# Altium PCB GoodProject_V2.1.PcbDoc
Units mil, origin at the board's own origin, x right, y up, seen from the top; angles counter-clockwise.
Board outline 2362.2 x 1574.8 mil, 2 copper layers (Top Layer, Bottom Layer); 65 components, 73 nets, 250 pads, 52 vias.
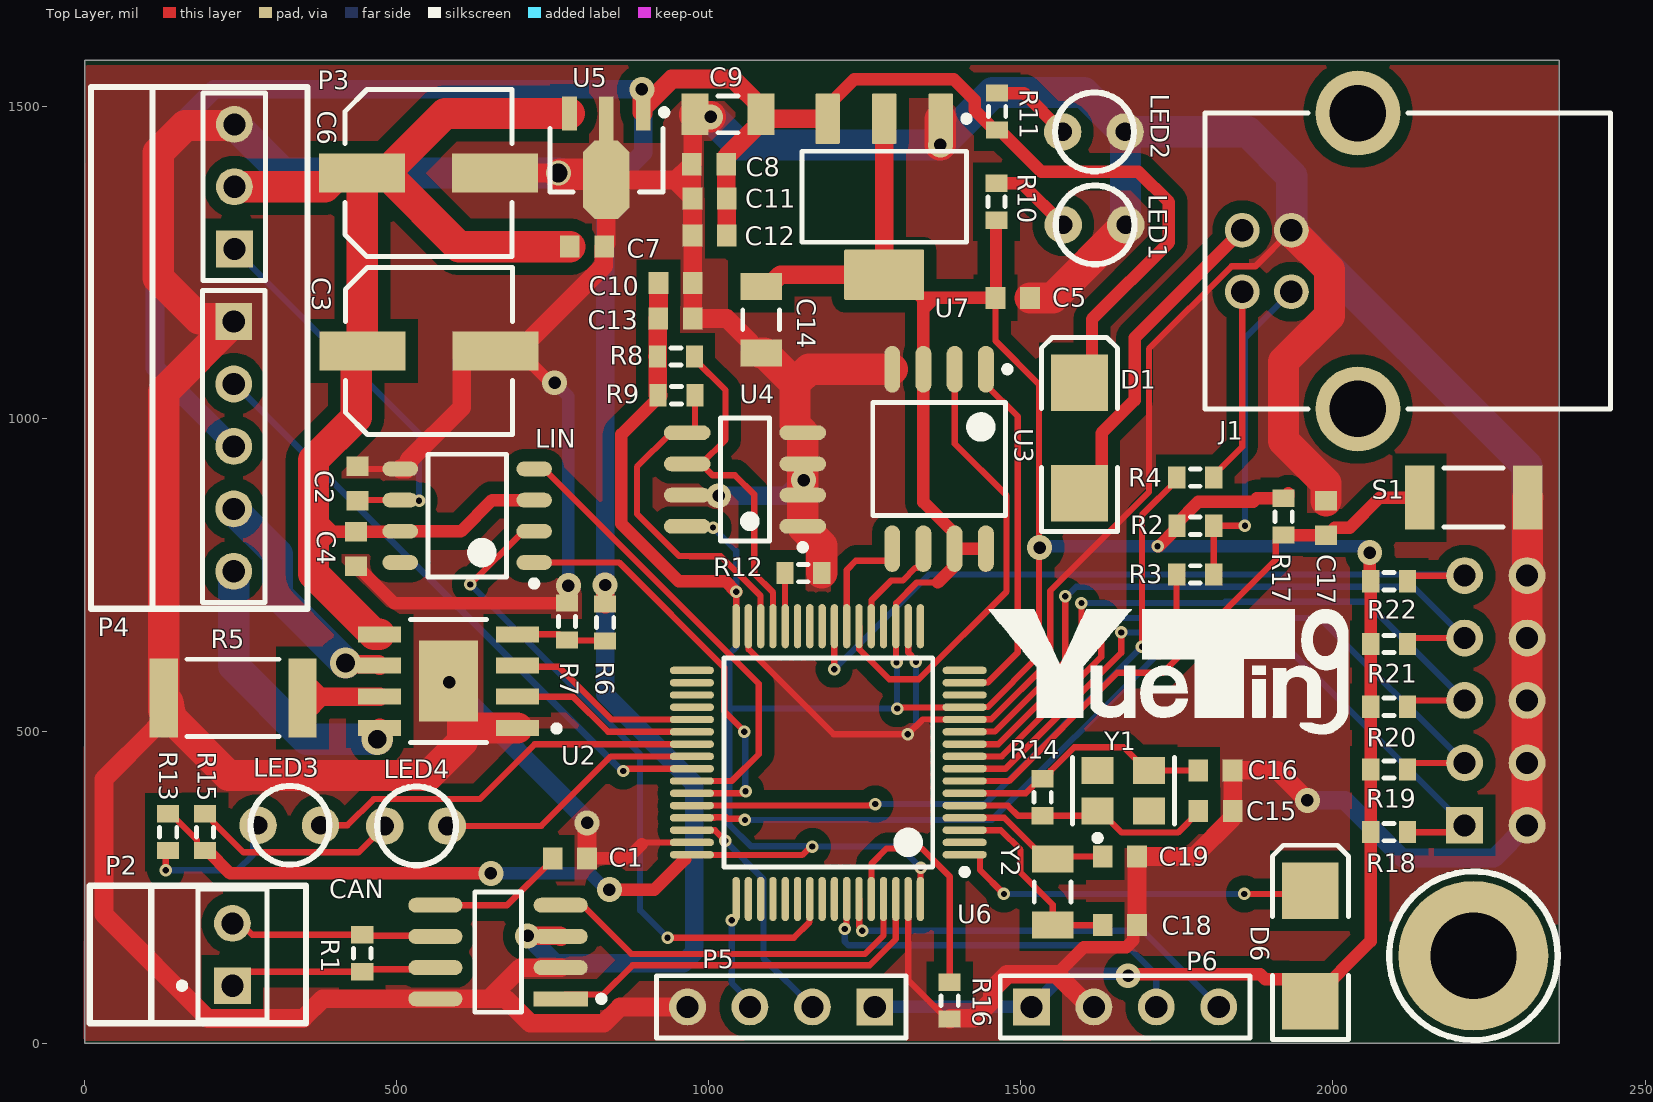
[diagram p0: Top Layer view]
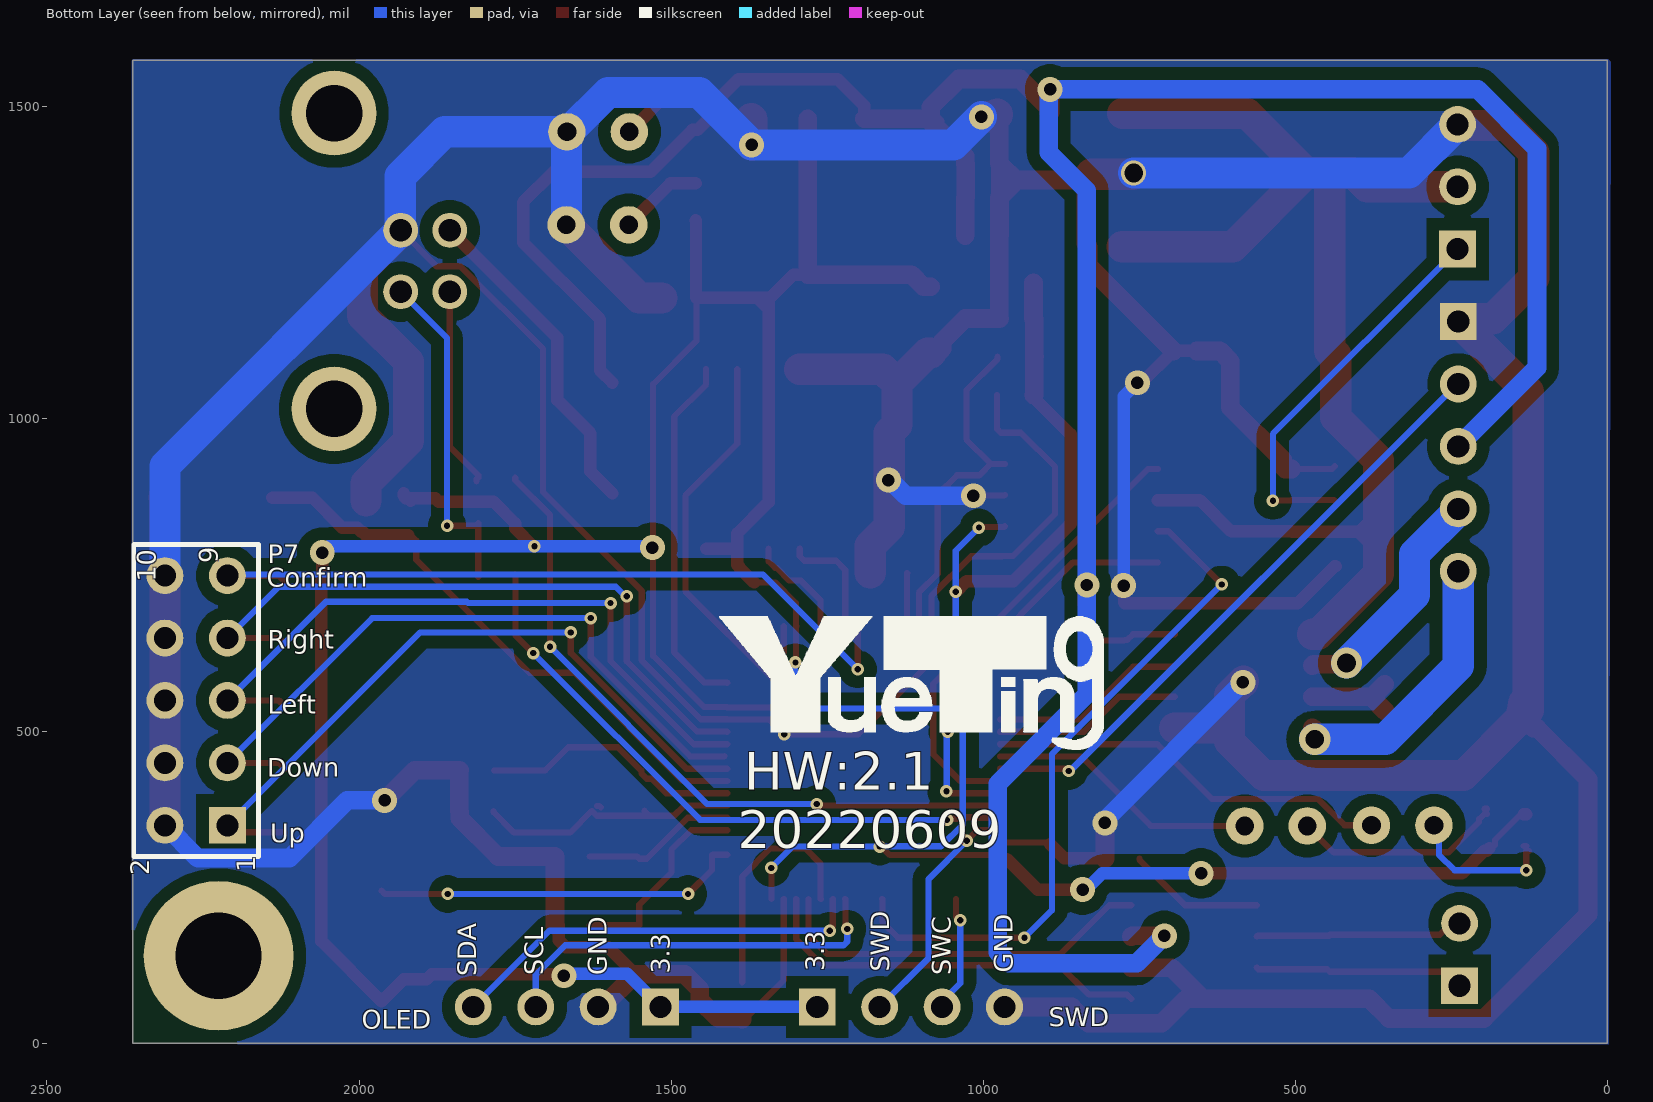
[diagram p1: Bottom Layer view, seen from below]

## Layer stack, top to bottom
Top Solder: solder mask 0.4, Solder Resist, Dk 3.5
Top Layer: signal copper 1.4
Dielectric 1: dielectric 12.6, FR-4, Dk 4.8
Bottom Layer: signal copper 1.4
Bottom Solder: solder mask 0.4, Solder Resist, Dk 3.5

## Board outline
0,0 0,1574.8 2362.2,1574.8 2362.2,0

## Design rules (kind name [scope] priority, off if disabled: settings)
Clearance [All] p1: gap=20 ignorepadtopadclearanceinfootprint=FALSE except(0: Arc-Text Track-Text SMDPad-Text THPad-Text Via-Text Fill-Text Poly-Text Region-Text Text-Text; 15: Arc-Arc Arc-Track Arc-SMDPad Arc-THPad Arc-Via Arc-Hole Track-Track Track-SMDPad Track-THPad Track-Via Track-Hole SMDPad-SMDPad SMDPad-THPad SMDPad-Via SMDPad-Hole THPad-THPad THPad-Via THPad-Hole Via-Via Via-Hole Text-Hole)
MinimumSolderMaskSliver [All] p1: minsoldermaskwidth=8
PlaneConnect [All] p1: planeconnectstyle=Direct reliefexpansion=20 reliefentries=4 reliefconductorwidth=10 reliefairgap=10
PolygonConnect [All] p1: connectstyle=Direct reliefconductorwidth=10 reliefentries=4 polygonreliefangle="90 Angle" airgapwidth=10
RoutingVias [All] p1: holewidth=10 width=20 viastyle="Through Hole" minholewidth=10 minwidth=20 maxholewidth=28 maxwidth=50
SilkToSilkClearance [All] p1: silktosilkclearance=2
SolderMaskExpansion [All] p1: expansion=4 istentingtop=FALSE
Width [All] p1: maxlimit=50 minlimit=10 preferedwidth=10
27 further rules are at their usual default settings.

## Components (designator, comment, footprint, x,y, rotation, side; value= is the part's Value field where it differs from the comment)
C1 "Cap" 1608[0603] 777.44,296 r0 top value=0.1uF
C2 "Cap" 1608[0603] 437,896.56 r270 top value=0.1uF
C3 "100uF" NIC-CAPA2-6.3X5.8_V 551.7,1109 r0 top
C4 "Cap" 1608[0603] 435,791.56 r90 top value=0.22uF
C5 "Cap" 1608[0603] 1487,1194 r0 top value=0.1uF
C6 "100uF" NIC-CAPA2-6.3X5.8_V 551,1394 r0 top
C7 "Cap" 1608[0603] 805,1276 r180 top value=22uF
C8 "Cap" 1608[0603] 1000.44,1408 r0 top value=22uF
C9 "Cap" C1206 1030.85,1488 r0 top value=100uF
C10 "Cap" 1608[0603] 947,1218 r180 top value=22pF
C11 "Cap" 1608[0603] 1001.44,1353 r0 top value=0.1uF
C12 "Cap" 1608[0603] 1001.44,1294 r0 top value=22uF
C13 "Cap" 1608[0603] 946.56,1161 r180 top value=22uF
C14 "Cap" C1206 1084,1158.85 r90 top value=22uF
C15 "Cap" 1608[0603] 1812,372 r0 top value=22pF
C16 "Cap" 1608[0603] 1811.56,437 r0 top value=22pF
C17 "Cap" 1608[0603] 1989,841.44 r270 top value=0.1uF
C18 "Cap" 1608[0603] 1658.56,189 r180 top value=22pF
C19 "Cap" 1608[0603] 1658.56,299 r180 top value=22pF
CAN "TJA1050T/CM,118" FP-SOT96-1-IPC_A 662.43,146 r180 top (schematic designator U1)
D1 "Diode" SMB 1594,969.42 r90 top
D6 "Diode 1N4148" SMB 1964,155.58 r90 top
J1 "61400416121" 61400416121 2120,1253 r90 top
LED1 "LED" led3mm 1568,1311 r0 top
LED2 "LED" led3mm 1567,1460 r0 top
LED3 "LED" led3mm 278,349 r0 top
LED4 "LED" led3mm 481,348 r0 top
LIN "TJA1020" SOP127P600X175-8N 613,845 r180 top (schematic designator *1)
P2 "Power" PIN2 236.88,92 r90 top
P3 "Header 3" HDR1X3 240,1272 r90 top
P4 "SENT" HDR1X5 239,1156 r270 top
P5 "SWD" HDR1X4 1266,58 r180 top
P6 "OLED" HDR1X4 1517,58 r0 top
P7 "Header 5X2" HDR2X5 2211,349 r90 bottom
R1 "Res3" J1-0603 445,144 r270 top value=120
R2 "Res3" J1-0603 1779.53,829 r180 top value=1.5K
R3 "Res3" J1-0603 1779.47,751 r180 top value=22
R4 "Res3" J1-0603 1779.47,906 r180 top value=22
R5 "0.12 1W" FP-CRCW2512-e3-IPC_C 238,553 r180 top
R6 "Res3" J1-0603 834,674 r270 top value=1K
R7 "Res3" J1-0603 773,675.47 r270 top value=1K
R8 "Res3" J1-0603 947.53,1100 r180 top value=4.7K
R9 "Res3" J1-0603 948.47,1038 r180 top value=4.7K
R10 "Res3" J1-0603 1461,1348 r90 top value=1K
R11 "Res3" J1-0603 1462,1492.53 r90 top value=1K
R12 "Res3" J1-0603 1151.47,753 r0 top value=10K
R13 "Res3" J1-0603 134,338 r270 top value=1K
R14 "Res3" J1-0603 1535,394 r270 top value=10M
R15 "Res3" J1-0603 193,338 r90 top value=1K
R16 "Res3" J1-0603 1386,68 r270 top value=10K
R17 "Res3" J1-0603 1921,843.44 r90 top value=10K
R18 "Res3" J1-0603 2090,338 r0 top value=10K
R19 "Res3" J1-0603 2090,438.5 r0 top value=10K
R20 "Res3" J1-0603 2090,539 r0 top value=10K
R21 "Res3" J1-0603 2090,639.5 r0 top value=10K
R22 "Res3" J1-0603 2090,740 r0 top value=10K
S1 "SW-PB" 12Z-2010 2225.39,874 r0 top
U2 "A4950ELJTR-T" FP-LJ-8-MFG 583,580 r180 top
U3 "W25Q128FVSIG" WINB-SOIC-8_M 1369,936 r270 top
U4 "24C02C-I/SN" SOIC-SN8_L 1058,903 r180 top
U5 "L78L05ABUTR" SOT-89_N 836,1414.5 r270 top
U6 "STM32F103RBT6" LQFP64_N 1191.5,449.53 r180 top
U7 "REG1117-3.3" DCY0004A_M 1281,1356 r270 top
Y1 "8M" FP-ASE-MFG 1664.34,404.52 r0 top
Y2 "32.768k" C1206 1551,242.15 r90 top

## Footprints (in the part's own frame and the unit in brackets; to place one, negate y for a bottom-side part, rotate by r counter-clockwise, add the part's x,y. Pads: shape width x height; smd on the part's side, far side on the other; paste and mask are expansions set on the pad)
12Z-2010 [mm] "Chip Resistor, Body 5.0x2.5mm, IPC High Density"
  rect 1.2x2.6 smd: 1(-2.2,0) 2(2.2,0)
  silkscreen extent -1.2,-1.2 1.2,1.2, body extent -2.58,-1.33 2.58,1.33, height 0.9
1608[0603] [mm] "Chip Capacitor, Body 1.6x0.8mm, IPC High Density"
  rect 0.8x0.9 smd: 1(-0.7,0) 2(0.7,0)
  body extent -0.87,-0.48 0.87,0.48, height 1.3
61400416121 [mm] "USB 2.0 Type B Horizontal"
  round 1.42 hole 0.92: 1(1.25,6.74) 2(-1.25,6.74) 3(-1.25,4.74) 4(1.25,4.74)
  round 3.45 hole 2.3: Shell(-6.02,2.03) Shell(6.02,2.03)
  silkscreen extent -6.02,-8.25 6.02,8.25, body extent -7.48,-8.25 7.48,8.25, height 11.08
C1206 [mm] "Chip Capacitor, Body 3.2x1.6mm, IPC High Density"
  rect 1.1x1.7 smd: 1(-1.35,0) 2(1.35,0)
  silkscreen extent -0.4,-0.75 0.4,0.75, body extent -1.7,-0.9 1.7,0.9, height 1.3
DCY0004A_M [mm] "SOT223, 4-Leads, Body 6.7x3.7mm, Pitch 2.3mm, IPC Low Density"
  rrect10% 2.05x1 smd: 1(-3.175,2.3) 2(-3.175,0) 3(-3.175,-2.3)
  rrect5% 2.05x3.25 smd: 4(3.175,0)
  silkscreen extent -3.3,-3.35 1.85,3.48, body extent -3.5,-3.25 3.5,3.25, height 1.62
FP-ASE-MFG [mm]
  rect 1.3x1.1 smd paste+0 mask+0: 1(-1.05,-0.825) 2(1.05,-0.825) 3(1.05,0.825) 4(-1.05,0.825)
  silkscreen extent -2.07,-2.05 2.07,1.35, body extent -1.8,-1.48 1.8,1.48, height 0.25
FP-CRCW2512-e3-IPC_C [mil]
  rect 45.47x126.31 smd paste+0 mask+0: 1(-111.25,0) 2(111.25,0)
  silkscreen extent -74,-62 74,62, body extent -138,-69 138,69, height 10
FP-LJ-8-MFG [mm]
  rect 1.75x0.65 smd paste+0 mask+0: 1(-2.8,1.905) 2(-2.8,0.635) 3(-2.8,-0.635) 4(-2.8,-1.905) 5(2.8,-1.905) 6(2.8,-0.635) 7(2.8,0.635) 8(2.8,1.905)
  rect 2.41x3.3 smd paste+0 mask+0: 9(0,0)
  silkscreen extent -4.52,-2.5 1.55,2.5, body extent -3.77,-2.6 3.77,2.6, height 0.25
FP-SOT96-1-IPC_A [mil]
  rect 86.79x23.94 smd paste+0 mask+0: 1(-100.43,75)
  rrect100% 86.79x23.94 smd paste+0 mask+0: 2(-100.43,25) 3(-100.43,-25) 4(-100.43,-75) 5(100.43,-75) 6(100.43,-25) 7(100.43,25) 8(100.43,75)
  silkscreen extent -170,-96 37,96, body extent -164,-116 164,116, height 10
HDR1X3 [mm] "Connector; Header; 3 Position"
  rect 1.5x1.5 hole 0.9: 1(0,0)
  round 1.5 hole 0.9: 2(2.54,0) 3(5.08,0)
  silkscreen extent -1.27,-1.27 6.35,1.27
HDR1X4 [mm] "Connector; Header; 4 Position"
  rect 1.5x1.5 hole 0.9: 1(0,0)
  round 1.5 hole 0.9: 2(2.54,0) 3(5.08,0) 4(7.62,0)
  silkscreen extent -1.27,-1.27 8.89,1.27
HDR1X5 [mm] "Connector; Header; 5 Position"
  rect 1.5x1.5 hole 0.9: 1(0,0)
  round 1.5 hole 0.9: 2(2.54,0) 3(5.08,0) 4(7.62,0) 5(10.16,0)
  silkscreen extent -1.27,-1.27 11.43,1.27
HDR2X5 [mm] "Connector; Header; 5x2 Position"
  rect 1.5x1.5 hole 0.9: 1(0,0)
  round 1.5 hole 0.9: 2(0,2.54) 3(2.54,0) 4(2.54,2.54) 5(5.08,0) 6(5.08,2.54) 7(7.62,0) 8(7.62,2.54) 9(10.16,0) 10(10.16,2.54)
  silkscreen extent -1.27,-1.27 11.43,3.81
J1-0603 [mm] "Chip Resistor, Body 1.6x0.8mm, IPC High Density"
  rect 0.7x0.9 smd: 1(-0.75,0) 2(0.75,0)
  silkscreen extent -0.2,-0.35 0.2,0.35, body extent -0.85,-0.48 0.85,0.48, height 0.9
led3mm [mil]
  round 60 hole 30: 1(0,0) 2(100,0)
  silkscreen extent -12,-63 114,63
LQFP64_N [mm] "Thin QFP, 64-Leads, Body 10x10mm, Pitch 0.5mm, IPC Medium Density"
  oval 1.8x0.3 smd: 1(-5.55,3.75) 2(-5.55,3.25) 3(-5.55,2.75) 4(-5.55,2.25) 5(-5.55,1.75) 6(-5.55,1.25) 7(-5.55,0.75) 8(-5.55,0.25) 9(-5.55,-0.25) 10(-5.55,-0.75) 11(-5.55,-1.25) 12(-5.55,-1.75) 13(-5.55,-2.25) 14(-5.55,-2.75) 15(-5.55,-3.25) 16(-5.55,-3.75) 33(5.55,-3.75) 34(5.55,-3.25) 35(5.55,-2.75) 36(5.55,-2.25) 37(5.55,-1.75) 38(5.55,-1.25) 39(5.55,-0.75) 40(5.55,-0.25) 41(5.55,0.25) 42(5.55,0.75) 43(5.55,1.25) 44(5.55,1.75) 45(5.55,2.25) 46(5.55,2.75) 47(5.55,3.25) 48(5.55,3.75)
  oval 0.3x1.8 smd: 17(-3.75,-5.55) 18(-3.25,-5.55) 19(-2.75,-5.55) 20(-2.25,-5.55) 21(-1.75,-5.55) 22(-1.25,-5.55) 23(-0.75,-5.55) 24(-0.25,-5.55) 25(0.25,-5.55) 26(0.75,-5.55) 27(1.25,-5.55) 28(1.75,-5.55) 29(2.25,-5.55) 30(2.75,-5.55) 31(3.25,-5.55) 32(3.75,-5.55) 49(3.75,5.55) 50(3.25,5.55) 51(2.75,5.55) 52(2.25,5.55) 53(1.75,5.55) 54(1.25,5.55) 55(0.75,5.55) 56(0.25,5.55) 57(-0.25,5.55) 58(-0.75,5.55) 59(-1.25,5.55) 60(-1.75,5.55) 61(-2.25,5.55) 62(-2.75,5.55) 63(-3.25,5.55) 64(-3.75,5.55)
  silkscreen extent -5.68,-4.25 4.25,4.57, body extent -5,-5 5,5, height 1.6
NIC-CAPA2-6.3X5.8_V [mm] "Aluminum Electrolytic Capacitor, Diameter 6.3mm, Height 6.1mm, Pitch 5.4mm"
  rect 3.5x1.6 smd: 1(-2.7,0) 2(2.7,0)
  silkscreen extent -3.4,-3.4 3.4,3.4, body extent -3.14,-3.12 3.14,3.15, height 6.1
PIN2 [mm] "Photosensitive Diode; 2 Leads"
  rect 1.5x1.5 hole 0.9: 1(0,0)
  round 1.5 hole 0.9: 2(2.54,0)
  silkscreen extent -1.4,-1.4 3.94,2.17
SMB [mm] "DO-214-AA/SMB; 2 C-Bend Leads; Body 5.3 x 3.6 mm, inc. leads (LxW)"
  rect 2.3x2.3 smd: 1(-2.25,0) 2(2.25,0)
  silkscreen extent -3.8,-1.55 4.1,1.55
SOIC-SN8_L [mm] "SOIC, 8-Leads, Body 4.9x3.9mm, Pitch 1.27mm, IPC High Density"
  oval 1.9x0.6 smd: 1(-2.35,1.905) 2(-2.35,0.635) 3(-2.35,-0.635) 4(-2.35,-1.905) 5(2.35,-1.905) 6(2.35,-0.635) 7(2.35,0.635) 8(2.35,1.905)
  silkscreen extent -2.48,-2.5 1,2.88, body extent -2,-2.5 2,2.5, height 1.75
SOP127P600X175-8N [mm] "SOP, 8-Leads, Body 4.90x3.90mm, Pitch 1.27mm, IPC Medium Density"
  oval 1.45x0.6 smd: 1(-2.725,1.905) 2(-2.725,0.635) 3(-2.725,-0.635) 4(-2.725,-1.905) 5(2.725,-1.905) 6(2.725,-0.635) 7(2.725,0.635) 8(2.725,1.905)
  silkscreen extent -2.85,-2.5 1.6,2.88, body extent -2,-2.5 2,2.5, height 1.75
SOT-89_N [mm] "SOT89, 3-Leads, Body 4.5x2.4 mm, Pitch 1.5mm, Lead Span 4.1mm, IPC Medium Density"
  rect 1.4x0.6 smd: 1(-1.9,1.5) 3(-1.9,-1.5)
  rect 1.8x0.6 smd: 2(-1.7,0)
  oct 3.2x1.9 smd: 2(0.8,0)
  silkscreen extent -2.07,-2.3 1.3,2.48, body extent -1.3,-2.3 1.3,2.3, height 1.6
WINB-SOIC-8_M [mm] "SOIC, 8-Leads, Body 5.4x5.4mm, Pitch 1.27mm, IPC Low Density"
  oval 1.9x0.65 smd: 1(-3.65,1.905) 2(-3.65,0.635) 3(-3.65,-0.635) 4(-3.65,-1.905) 5(3.65,-1.905) 6(3.65,-0.635) 7(3.65,0.635) 8(3.65,1.905)
  silkscreen extent -3.77,-2.7 2.3,2.91, body extent -2.7,-2.7 2.7,2.7, height 2.16

## Part data
C1 C2 C4 C5 C7 C8 C9 C10 C11 C12 C13 C14 C15 C16 C17 C18 C19: "Capacitor", LatestRevisionDate=17-Jul-2002, LatestRevisionNote="Re-released for DXP Platform.", PackageDescription="Radial Cap, Thru-Hole; 2 Leads; 0.3 in Pin Spacing", PackageReference=RAD-0.3, Published=8-Jun-2000, Publisher="Altium Limited"
C3 C6: library part CMP-0687-00035-1, "Aluminum Electrolytic Capacitor, UD Series, Low Impedance, 68 uF, 16 V, + / - 20%, -55 to 105 degC, Chip Type, 6.3 x 5.8 mm D x L, Pb-Free, Reel", Manufacturer=Nichicon, PartNumber=UUD1C680MCL1GS, Rated Capacitance="68 uF", Rated Ripple Current (at 100kHz)="230 mA", Rated Voltage="50 V", Tolerance Rated Capacitance="-20 to 20%", ComponentLink1Description="Manufacturer URL", ComponentLink1URL=http://www.nichicon.co.jp/, ComponentLink2Description=Datasheet, ComponentLink2URL=http://products.nichicon.co.jp/en/pdf/XJA043/e-ud.pdf, ComponentLink3Description="Package Specification", ComponentLink3URL=http://products.nichicon.co.jp/en/pdf/XJA043/e-ud.pdf, DatasheetVersion=08/2012, Diameter="6.3 mm", Endurance Time="2000 h", Impedance="0.44 Ohm", Length="5.8 mm", Mounting Technology="Surface Mount", PackageDescription="2-Pin Surface Mount Device, Diameter 6.3 mm, Height 5.8 mm, Pitch 5.4 mm", PackageReference=CAPAE-D6.3H5.8, Packing="Dia382mm Reel", RoHS=TRUE
CAN: library part CMP-2000-04923-2, "IC TRANSCEIVER HALF 1/1 8SO", Case/Package=SO, Max Operating Temperature=150°C, Max Supply Current=10mA, Max Supply Voltage=5.25V, Min Operating Temperature=-40°C, Min Supply Voltage=4.75V, Package Quantity=2500, Contact Plating=Gold, Data Rate=1Mbps, Interface=CAN, Lead Free="Lead Free", Mount="Surface Mount", Nominal Supply Current=10mA, Number of Pins=8, Number of Receive Buffers=1, Number of Transceivers=1, Number of Transmit Buffers=1, Packaging="Tape and Reel", Radiation Hardening=No, REACH SVHC="No SVHC", Receiver Hysteresis=70mV, Simplex/Duplex="Half Duplex"
D1: "Default Diode", Code_JEDEC=DO-214-AB, LatestRevisionDate=17-Jul-2002, LatestRevisionNote="Re-released for DXP Platform.", PackageDescription="DO-214-AB/SMC; 2 C-Bend Leads; Body 7.9 x 5.9 mm, inc. leads (LxW)", PackageReference=SMC, PackageVersion=Sep-1996, Published=8-Jun-2000, Publisher="Altium Limited"
D6: "High Conductance Fast Diode", Code_JEDEC=DO-204-AH, ComponentLink1Description="Manufacturer Link", ComponentLink1URL=http://www.fairchildsemi.com/, ComponentLink2Description=Datasheet, ComponentLink2URL=http://www.fairchildsemi.com/ds/1N%2F1N4148.pdf, DatasheetVersion=1997, LatestRevisionDate=17-Jul-2002, LatestRevisionNote="Re-released for DXP Platform.", PackageDescription="Diode, Axial; Body 3.8 x 1.9 mm (LxDia. max), Lead Dia. 0.53 mm (max)", PackageReference=DO-35, Published=8-Jun-2000, Publisher="Altium Limited"
J1: library part CMP-1502-03243-1, "USB 2.0 Type B Receptacle WR-COM, Horizontal, THT, with Pads and Pegs", Contact Resistance=20mOhm, Manufacturer="Wurth Elektronik", Operating Temperature=-40to105degC, Rated Current=1.5A, Working Voltage=30VAC, Connector Type=USB2.0TypeB, Datasheet URL=https://katalog.we-online.de/em/datasheet/61400416121.pdf, Gender=Receptacle, Manufacturer URL=http://www.we-online.de, Mounting Technology=THT, Orientation=Horizontal, Package Reference=61400416121, Packaging=Tray, Part Number=61400416121, Publisher=WurthElektronik
P2: library part "Header 2H", "Header, 2-Pin, Right Angle", LatestRevisionDate=17-Jul-2002, LatestRevisionNote="Re-released for DXP Platform.", Publisher="Altium Limited"
P3: "Header, 3-Pin", LatestRevisionDate=17-Jul-2002, LatestRevisionNote="Re-released for DXP Platform.", Publisher="Altium Limited"
P4: library part "Header 5", "Header, 5-Pin", LatestRevisionDate=17-Jul-2002, LatestRevisionNote="Re-released for DXP Platform.", Publisher="Altium Limited"
P5 P6: library part "Header 4", "Header, 4-Pin", LatestRevisionDate=17-Jul-2002, LatestRevisionNote="Re-released for DXP Platform.", Publisher="Altium Limited"
P7: "Header, 5-Pin, Dual row", LatestRevisionDate=17-Jul-2002, LatestRevisionNote="Re-released for DXP Platform.", Publisher="Altium Limited"
R1 R2 R3 R4 R6 R7 R8 R9 R10 R11 R12 R13 R14 R15 R16 R17 R18 R19 R20 R21 R22: "Resistor", LatestRevisionDate=29-May-2009, LatestRevisionNote="IPC-7351 Footprint Added.", PackageDescription="Chip Resistor", PackageReference=J1-0603, Published=8-Jun-2000, Publisher="Altium Limited"
R5: library part CMP-02407-006956-1, "RES Thick Film, 1Ω, 1%, 1W, 100ppm/°C, 2512", Case Code (Imperial)=2512, Case Code (Metric)=6432, Max Operating Temperature=155°C, Max Power Dissipation=1W, Min Operating Temperature=-55°C, Package Quantity=2000, Resistance=1R, Temperature Coefficient=100ppm/°C, Tolerance=1%, Voltage Rating=500V, Case/Package=2512, Composition="Thick Film", Contact Plating=Tin, Depth=3.15mm, Features="Automotive AEC-Q200", Height=0.6mm, Lead Free="Lead Free", Length=6.3mm, Military Standard=Not, Mount="Surface Mount", Number of Pins=2, Number of Terminations=2, Packaging="Tape and Reel", Power Rating=1W, Radiation Hardening=No, REACH SVHC="No SVHC", Termination=SMD/SMT, Voltage Rating (DC)=500V, Weight=0.001429oz, Width=0.124inch
S1: "Switch", LatestRevisionDate=17-Jul-2002, LatestRevisionNote="Re-released for DXP Platform.", PackageDescription="Switch; 2 Leads", PackageReference=SPST-2, Published=24-Mar-1999, Publisher="Altium Limited"
U2: library part CMP-82903-000003-1, "IC MOTOR DRIVER 8V-40V 8SOIC", Case/Package=SOIC, Collector Emitter Voltage (VCEO)=40V, Max Collector Current=3.5A, Max Operating Temperature=85°C, Min Operating Temperature=-40°C, Min Supply Voltage=8V, Package Quantity=1, Height=1.55mm, Lead Free="Lead Free", Length=4.9mm, Max Supply Voltage=40V, Motor Type=Brushed, Mount="Surface Mount", Number of Outputs=1, Number of Pins=8, Output Current=3.5A, Output Voltage=40V, Packaging="Tape and Reel", Radiation Hardening=No, REACH SVHC="No SVHC", Width=3.9mm
U3: library part CMP-2000-05005-1, "3V 128M-Bit Serial Flash Memory with Dual/Quad SPI & QPI, 2.7 to 3.6 V, -40 to 85 degC, 8-Pin SOIC, RoHS, Tape and Reel", Manufacturer=Winbond, Operating Supply Voltage (Max)=3.6V, Operating Supply Voltage (Min)=2.7V, Operating Supply Voltage (Typ)=3/3.3V, Operating Temp Range=-40Cto85C, Operating Temperature (Max)=85C, Operating Temperature (Min)=-40C, Operating Temperature Classification=Industrial, Package Description="8-Pin Small Outline Integrated Circuit, Body 5.28 x 5.28 mm, Pitch 1.27 mm", Package Reference=SS-8, Package Type=SOICW, Program/Erase Volt (Typ)=2.7to3.6V, Supply Current=20mA, Access Time (Max)=7ns, Address Bus=24b, Boot Type=NotRequired, Cell Type=NOR, Datasheet URL=http://download.siliconexpert.com/pdfs/2015/11/30/6/42/17/890/win_/manual/3w25q128fv20rev.l2008242015.pdf, Datasheet Version="Rev. L, 08/2015", Density=134217728Bit, Interface Type=Serial(SPI), Manufacturer URL=http://www.winbond.com/hq/index.html?__locale=en, Mounting=SurfaceMount, Number of Words=16777216, Pin Count=8, Programmable=Yes, Rad Hardened=No, Sync/Async=Synchronous, Word Size=8b
U4: library part CMP-0159-00277-1, "2Kbit, 400kHz, 5V, I2C Serial EEPROM, 8-Pin SOIC 150mil, Industrial Temperature", Code_IPC=SOIC127P600-8, Code_JEDEC=MS-012, DatasheetVersion="revJ, Aug-2008", PackageDescription="8-Lead Plastic Small Outline (SN) - Narrow, 3.90mm Body [SOIC]", PackageReference=SOIC-SN8, PackageVersion="revBB, Aug-2009"
U5: library part CMP-0244-00406-1, "Positive Voltage Regulator, 5V, 4-Pin SOT-89, Tape and Reel", ComponentLink1Description="Manufacturer URL", ComponentLink1URL=http://www.st.com, ComponentLink2Description=Datasheet, ComponentLink2URL=http://www.st.com/internet/com/TECHNICAL_RESOURCES/TECHNICAL_LITERATURE/DATASHEET/CD00000446.pdf, DatasheetVersion=1/02/2011, PackageDescription="3-Pin SOT-89 Package 1.5 mm Pitch, 4.1 mm Lead Span", PackageReference=SOT-89, PackageVersion=2011
U6: "STM32 ARM-based 32-bit MCU with 128 Kbytes Flash, 64-pin LQFP, Industrial Temperature", ComponentLink1Description="Manufacturer Link", ComponentLink1URL=www.st.com/stm32, ComponentLink2Description=Datasheet, ComponentLink2URL=http://www.st.com/stonline/products/literature/ds/13587.pdf, DatasheetVersion="rev6, Mar-2008", PackageDescription="64-Pin Low-Profile Quad Flat Pack, 10 x 10 mm Body, 0.5 mm Pitch (LQFP64)", PackageReference=LQFP64, PackageVersion=Mar-2008, Published=30-May-2008, Publisher="Altium Limited"
U7: library part CMP-0395-00549-2, "Single Output LDO, 800 mA, Fixed 3.3 V Output, 3.8 to 15 V Input, with Internal Current Limiting, 4-pin SOT-223 (DCY), -40 to 125 degC, Green (RoHS & no Sb/Br)", Manufacturer="Texas Instruments", Rating=Catalog, Code_JEDEC=TO-261, ComponentLink1Description="Manufacturer URL", ComponentLink1URL=http://www.ti.com/, ComponentLink2Description=Datasheet, ComponentLink2URL=http://www.ti.com/general/docs/lit/getliterature.tsp?genericPartNumber=REG1117-33&fileType=pdf, ComponentLink3Description="Package Specification", ComponentLink3URL=http://www.ti.com/litv/pdf/mpds094a, DatasheetVersion=SBVS001D, Eco-Plan="Green (RoHS & no Sb/Br)", Fixed Output Options(V)=5, Iout(Max)(A)=0.8, Iq(Typ)(mA)=4, Mounting Technology="Surface Mount", PackageDescription="4-Pin Plastic Small Outline, Body 3.5 x 6.5 mm, Pitch 2.3 mm", PackageReference=DCY0004A, PackageVersion=4202506/B, PartNumber=REG1117-3.3, SubFamily="Single Channel LDO", Vdo(Typ)(mV)=1100, Vin(Max)(V)=15, Vin(Min)(V)=3.8, Vout Adj(Max)(V)=3.3, Vout Adj(Min)(V)=3.3
Y1: library part CMP-27762-010648-1, "XTAL Oscillator 33.333MHz ±50ppm CMOS 3.3V 4-SMD 3.2mm x 2.5mm", Case/Package=SMD/SMT, Frequency=33.333MHz, Frequency Stability=50ppm, Load Capacitance=15pF, Max Operating Temperature=85°C, Max Supply Current=13mA, Max Supply Voltage=3.465V, Min Operating Temperature=-40°C, Min Supply Voltage=3.135V, Operating Frequency="33.333 MHz", Operating Supply Voltage=3.3V, Package Quantity=1000, Depth=2.5mm, Height=0.047inch, Lead Free="Lead Free", Length=3.2mm, Mount="Surface Mount", Number of Pins=4, Packaging="Tape and Reel", Radiation Hardening=No, REACH SVHC="No SVHC", Series=ASE, Termination=SMD/SMT, Width=0.098inch
Y2: library part XTAL, "Crystal Oscillator", LatestRevisionDate=17-Jul-2002, LatestRevisionNote="Re-released for DXP Platform.", PackageDescription="Crystal, Thru-Hole; 2 Leads; Body 3.1 x 8.2 mm (Dia.xH)", PackageReference=R38, Published=8-Jun-2000, Publisher="Altium Limited"

## Free pads (board coordinates)
  round 240 hole 138: 5(2225,140)

## Via types
v1: diameter 20, hole 10, Top Layer to Bottom Layer, tented both sides, 28 vias
v2: diameter 40, hole 20, Top Layer to Bottom Layer, tented both sides, 9 vias
v3: diameter 40, hole 20, Top Layer to Bottom Layer, 8 vias
v4: diameter 20, hole 10, Top Layer to Bottom Layer, 4 vias
v5: diameter 50, hole 30, Top Layer to Bottom Layer, 2 vias
v6: diameter 40, hole 30, Top Layer to Bottom Layer, tented both sides, 1 vias

## Nets (pads, with @x,y where several pads share a name; then routed paths per layer and width w, separated by ;. In a path a pad name is that pad's centre, name@x,y a point inside that pad or via, vN(x,y) a via of type N, cw(c..) or ccw(c..) an arc to the next point about the centre after c; other vN are vias at no path point)
3.3: C5.1 C10.2 C13.2 C14.2 D6.1 P5.1 P6.1 R2.2 R8.2 R9.2 R10.1 R13.1 R15.1 R17.2 R18.1 R19.1 R20.1 R21.1 R22.1 U3.3 U3.7 U3.8 U4.8 U6.13 U6.19 U6.32 U6.48 U6.64 U7.2 U7.4 | length 7743.9
  Top Layer w10: R13.1 137.94,367.53 180.28,325.18 180.28,317.25 189.06,308.47 R15.1 ; U4.8 966.48,827 1006,827 v4(1007,826) ; U6.48 973.34,301.54 1016.47,301.54 1016.75,301.26 1149.56,301.26 1163.29,315 v1(1166,315) ; U6.32 1043.93,668.1 1043.93,722.93 v4(1044,723) ; v1(1300.91,609.94) 1300.11,610.74 1300.11,667.69 U6.19 1300.11,668.38 1300.11,704.96 1333.15,738 1367,738 ; v1(1302,536) 1303.76,537.76 1409.65,537.76 U6.13 1410.35,538.46 1446.93,538.46 1529,620.53 1529,1055.79 1459.44,1125.35 C5.1 ; U6.64 1339.44,231.32 1339.44,280.44 v1(1339.74,280.74)
  Top Layer w20: R13.1@130,367.06 R13.1@133.94,367.06 ; R15.1@189.22,312.25 R15.1 196.94,308.47 233.41,272 v2(651,272) ; v2(841,246) 913,246 962,295 ; R9.2@918.47,1038.47 915.17,1035.17 915.17,1030.28 860,975.12 860,832 951.84,740.16 1026.84,740.16 v4(1044,723) ; U7.4 1304.62,1231 U7.4@1341.62,1194 ; 1367,738 1391.2,762.2 1391.2,763.38 1394,766.18 U3.7 ; U3.8 U3.7 ; R10.1 1460.22,1317.69 1460.22,1194.78 C5.1 1362,1194 ; v2(1672,108) 1674.16,110.16 1883.84,110.16 1891.72,102.28 1928.72,102.28 D6.1 2060.47,163.47 R18.1 R19.1 R20.1 R21.1 R22.1 2059,741.47 v2(2059,785.88) ; v1(1719,796) 1720.94,796 1750,825.06 R2.2 1750,832.94 1784.06,867 1872,867 1877.97,872.97 R17.2 ; R17.2@1917.22,869.19 R17.2 ; R17.2@1928.72,880.69 1928.72,876.75 1924.94,872.97 R17.2 ; U7.4@1341.62,1194 1362,1194 ; U7.4@1341.62,1194 1344,1191.62 1344,1176 ; 1344,1176 U3.3 1344,866.91 1394,816.91 U3.7 ; 1344,1176 1362,1194
  Top Layer w30: R9.2 918.47,1038.47 918.47,1099.53 R8.2 918.5,1100.5 918.5,1160.5 C13.2 ; C13.2@919.44,1161.44 C10.2 ; C14.2 1095.81,1212 1114.81,1231 U7.4 U7.2
  Bottom Layer w10: v4(1007,826) 1044,789 v4(1044,723) 1044,634.65 1033,623.65 1033,538 ; v1(1300.91,609.94) 1301.5,609.35 1301.5,536.5 v1(1302,536) 1035,536 1033,538 ; v1(1339.74,280.74) 1305.1,315.38 1304.72,315 v1(1166,315) 1165.62,315.38 1067.69,315.38 1033,350.06 1033,538
  Bottom Layer w20: v2(651,272) 809.59,272 835.59,246 v2(841,246) ; P5.1 P6.1 1569.97,110.97 1669.03,110.97 v2(1672,108) ; v2(1530,794) 1532,796 v1(1719,796) 2048.88,796 v2(2059,785.88)
+5: C8.2 C9.2 C11.2 C12.2 CAN.3 D1.2 P4.3 R6.1 R11.1 U5.1 U7.3 | length 4850.5
  Top Layer w10: C11.2@1028,1354 C11.2
  Top Layer w20: C8.2 C8.2@1028,1409.97 ; C9.2@1072.35,1476.35 C9.2 C9.2@1091,1481 ; U7.3 1190.45,1501.67 1232.78,1544 1392.89,1544 1425.91,1510.98 1425.91,1495.15 1458.06,1463 R11.1 1465.94,1463 1532.94,1396 1688.28,1396 1737,1347.28 1737,1283 1614,1160 1614,1078 D1.2
  Top Layer w30: v2(710,172) 761.86,172 CAN.3 ; R6.1 v3(834,734) ; v3(893,1528) 893,1491.35 U5.1 895.06,1498.67 940.85,1544.46 1039.35,1544.46 1084,1499.81 C9.2 1084,1476.19 1028.75,1420.94 1028.75,1408.75 C8.2 1028,1355.97 1029,1354.97 C11.2 C12.2 ; C9.2@1091,1481 U7.3
  Bottom Layer w30: P4.3 113,1082 113,1433 208,1528 v3(893,1528) 894.91,1526.09 894.91,1426.91 834,1366 v3(834,734) 834,558.6 977,415.6 977,145.57 959.43,128 754,128 v2(710,172)
CAN-H: CAN.7 P2.1 R1.2 | length 337.1
  Top Layer w10: P2.1 259.35,114.47 R1.2 448.86,118.33 559.33,118.33 CAN.7
CAN-L: CAN.6 P2.2 R1.1 | length 333.8
  Top Layer w10: P2.2 250.16,192 268.63,173.53 R1.1 446.26,172.26 560.74,172.26 CAN.6
CAN-RX: CAN.4 U6.61 | length 620.2
  Top Layer w10: CAN.4 798,221 876,143 1250.53,143 1280.08,172.55 U6.61
CAN-TX: CAN.1 U6.62 | length 640.8
  Top Layer w10: CAN.1 769.83,77.97 830.97,77.97 878,125 1257.98,125 1299.76,166.78 U6.62
EE_SCL: R8.1 U4.6 U6.29 | length 560
  Top Layer w10: U4.6 U4.6@988,928 ; R8.1 977.06,1096.06 1027,1046.12 1027,967 U4.6@988,928 ; U6.29 1102.91,722.07 1073,751.98 1073,879 1042,910 1006,910 U4.6@988,928
EE_SDA: R9.1 U4.5 U6.30 | length 548.3
  Top Layer w10: R9.1 978,984.29 971.71,978 939.89,978 885,923.11 885,847.8 952.24,780.57 969.71,780.57 970.03,780.24 1019.28,780.24 1082.88,716.65 1082.88,668.38 U6.30
FLASH_CS: U3.1 U6.15 | length 580
  Top Layer w10: U6.15 1410.35,577.83 1446.93,577.83 1495,625.9 1495,1004.09 1444,1055.09 U3.1
FLASH_MISO: U3.2 U6.22 | length 741.7
  Top Layer w10: U6.22 1241.06,667.69 1241.06,631.11 1289.16,583 1336.53,583 1477,723.47 1477,877.45 1394,960.45 U3.2
FLASH_MOSI: U3.5 U6.23 | length 184.4
  Top Layer w10: U6.23 1221.02,758.02 1235.69,772.69 1286.8,772.69 1294,779.89 U3.5
FLASH_SCK: U3.6 U6.21 | length 171.3
  Top Layer w10: U6.21 1260.74,668.38 1260.74,709.74 1292,741 1310.7,741 1331.04,761.34 1333.43,761.34 1344,771.91 U3.6
GND: C1.2 C2.1 C3.2 C4.1 C5.2 C6.2 C7.1 C8.1 C9.1 C10.1 C11.1 C12.1 C13.1 C14.1 C15.2 C16.2 C17.1 C18.1 C19.1 CAN.2 CAN.8 J1.4 LED1.2 LED2.2 LIN.5 P3.3 P4.1 P5.4 P6.2 P7.2 P7.4 P7.6 P7.8 P7.10 R5.2 R7.1 R12.2 R16.2 S1.2 U2.1 U2.9 U3.4 U4.1 U4.2 U4.3 U4.4 U4.7 U5.2 U6.12 U6.18 U6.31 U6.47 U6.63 U7.1 | length 14294.5
  Top Layer w10: C2.1 441.12,920 LIN.5 ; 893,319 895.57,321.57 U6.47 ; U4.7 965.98,877.5 1015.5,877.5 v3(1016,877) ; C11.1@971,1355.88 C11.1 ; C8.1@971,1406.12 C8.1 ; C9.1@972.88,1483.18 974.42,1484.72 C9.1 ; U6.31 1063.89,667.69 1063.89,631.11 1200,495 v1(1319,495) 1342.43,518.43 U6.12 1410.35,518.77 1452.7,518.77 1547,613.08 1547,724.57 1705.22,882.79 1705.22,1112.28 1837.68,1244.74 1875.91,1244.74 J1.4 ; U6.63 1319.45,101.09 1382.06,38.47 R16.2 ; U6.18 1319.8,667.69 1319.8,625.91 1332,613.71 v1(1332,611) ; C16.2 1839.34,436.78 C16.2@1839.56,436.56
  Top Layer w20: C4.1 436.97,764 495.97,705 R7.1 774,706 774,732 v3(775,733) ; C3.2 695.4,1109 746.4,1058 v2(753,1058) ; C1.2 870,296 893,319 ; 1557.66,110.53 1600.42,153.28 1668.65,153.28 1680.37,165 1680.37,183.25 C18.1@1685.37,188.25
  Top Layer w30: R5.2@123.56,515.56 123.56,509.38 119.02,504.85 112.85,504.85 31,423 31,206.3 197.83,39.47 349.95,39.47 381.48,71 CAN.8 648,71 ; LIN.5 516.07,920 519.26,923.19 519.26,933.54 604.1,1018.39 604.1,1092.5 620.6,1109 C3.2 ; C6.2@662.8,1388.5 C6.2 v6(759,1394) v6@760.91,1392.09 ; C3.2@695.4,1109 831.81,1245.41 831.81,1275.25 C7.1 832.56,1277.97 836,1281.41 U5.2@836,1383 ; CAN.2 698,121 648,71 ; C1.2 v2(805,353) ; U5.2@826.91,1392.09 U5.2@836,1383 ; P5.4 858,58 832,32 713.97,32 674.97,71 648,71 ; C8.1@971,1406.12 947.88,1383 ; C9.1@974.42,1484.72 974.42,1409.54 C8.1 C11.1@972.88,1355.97 ; C14.1 1072.19,1105.7 1065.54,1112.35 1065.54,1124.17 1028.7,1161 C13.1 974.34,1161.22 974.34,1217.78 C10.1 974.22,1218.34 974.22,1293.66 C12.1 C11.1 973.88,1354.97 C11.1@972.88,1355.97 ; R16.2 1387.22,39.69 1424.69,39.69 1454,69 1454,86.58 1477.95,110.53 1557.66,110.53 1610.19,58 P6.2 ; C18.1@1685.37,188.25 C18.1 C19.1 1777.43,299 1838.81,360.38 1838.81,371.25 C15.2 1839.34,372.22 C16.2@1839.34,436.78 ; C16.2 1911,437 v2(1959,389) ; U5.2@836,1383 947.88,1383 ; 947.88,1383 947.88,1380.97 C11.1@972.88,1355.97
  Top Layer w50: R5.2@138.84,520.91 230.75,429 551,429 605.44,483.44 U2.9@605.44,515.56 ; P3.3 238.27,1470.27 161.27,1470.27 118,1427 118,1226 183.47,1160.53 234.47,1160.53 P4.1 126.75,1043.75 R5.2 ; U2.9 U2.9@584,579 ; v3(584,578) U2.9@584,579 ; U2.1 616,505 U2.9@605.44,515.56 ; v6@760.91,1392.09 U5.2@826.91,1392.09 ; C9.1 977.7,1487.35 981.05,1484 v3(1003,1484) ; C14.1 1089.12,1105.7 1138.12,1056.7 ; R12.2 1181,796.73 1150.52,827.21 U4.1 U4.2 U4.3 U4.4 1138.12,990.4 1138.12,1056.7 ; U3.4 1161.12,1079.7 1138.12,1056.7 ; v3(1371,1439) 1371,1480.45 U7.1 ; C5.2 1551,1194 LED1.2 LED1.2@1667.5,1311.5 ; LED2.2 LED2.2@1667.5,1459.5 ; J1.4 1933.39,1300.61 1994.34,1239.66 1994.34,1165.34 1921,1092 1921,965 1989,897 C17.1 ; P7.2 P7.4 P7.6 P7.8 P7.10 2311.5,749.5 2311.5,873.5 S1.2 ; R5.2 126.75,533.28 138.6,521.16 136.7,531.22 133.82,546.4 127.15,553.07 R5.2 ; U2.9@584,579 605.44,557.56 U2.9@605.44,515.56
  Bottom Layer w10: v1(1319,495) 1319,497.71 1332,510.71 v1(1332,611)
  Bottom Layer w20: v2(753,1058) 775,1036 v3(775,733)
  Bottom Layer w30: v3(584,578) 805,357 v2(805,353) ; v3(1016,877) 1124.29,877 1149.29,902 v3(1152,902) ; v2(1959,389) 2019,389 2111.53,296.47 2258.13,296.47 2310.66,349 P7.2
  Bottom Layer w50: P3.3 318,1394 v6(759,1394) ; v3(1003,1484) 1048,1439 v3(1371,1439) 1455,1523 1601.29,1523 1664.29,1460 LED2.2 ; LED1.2 1667.5,1311.5 1667.5,1459.5 LED2.2 ; P7.10 2311,924.6 J1.4 1934,1302.83 1934,1389 1863,1460 LED2.2
KEY-CONFIRM: P7.9 R22.2 U6.24 | length 1238.3
  Top Layer w10: v1(1201,599) 1201.17,599.17 1201.17,667.86 U6.24 ; R22.2 2119.53,740.22 2128.31,749 P7.9
  Bottom Layer w10: v1(1201,599) 1353,751 2209,751 P7.9
KEY-DOWN: P7.3 R19.2 U6.9 | length 1117.9
  Top Layer w10: U6.9@1414.43,459.72 1414.78,459.37 1469.66,459.37 1629,618.71 v1(1629,681) ; R19.2 2119.53,440.22 2128.31,449 P7.3
  Bottom Layer w10: v1(1629,681) 1979,681 P7.3
KEY-LEF: P7.5 R20.2 U6.10 | length 1111.6
  Top Layer w10: U6.10 1463.89,479.06 1597,612.16 v1(1597,705) ; R20.2 2119.53,540.22 2128.31,549 P7.5
  Bottom Layer w10: v1(1597,705) 1825.35,705 1827.35,707 2053,707 P7.5
KEY-RIGHT: P7.7 R21.2 U6.11 | length 1088.2
  Top Layer w10: U6.11 1410.35,499.09 1458.47,499.09 1571,611.62 v1(1571,716.05) ; R21.2 2119.53,640.22 2128.31,649 P7.7
  Bottom Layer w10: v1(1571,716.05) 1573.71,716.05 1588.66,731 2129,731 P7.7
KEY-UP: P7.1 R18.2 U6.8 | length 1134.6
  Top Layer w10: U6.8 1475.43,439.68 1661,625.25 v1(1661,658) ; R18.2 2200,338 P7.1
  Bottom Layer w10: v1(1661,658) 1902,658 P7.1
LED1: LED3.2 U6.39 | length 648.9
  Top Layer w10: LED3.2 421.19,349 463.19,391 632.98,391 721.03,479.06 U6.39
LED2: LED4.2 U6.40 | length 438.1
  Top Layer w10: LED4.2 732,348 843.37,459.37 U6.40
LIN: C2.2 LIN.6 P3.1 | length 625.4
  Top Layer w10: C2.2 438,870 LIN.6 506.22,869.5 535.5,869.5 v1(536,869)
  Bottom Layer w10: P3.1 536,976 v1(536,869)
LIN-RXD: LIN.1 U6.43 | length 673.8
  Top Layer w10: LIN.1 856.42,770 1025,601.42 1025,532 1057,500 v1(1057,499) ; U6.43 1052.98,400.31 1056.29,403.63 v1(1059,403.63)
  Bottom Layer w10: v1(1057,499) 1058.5,497.5 1058.5,404.13 v1(1059,403.63)
LIN-SLP: LIN.2 U6.55 | length 1109.5
  Top Layer w10: v1(618,735) 618.28,735 703.28,820 LIN.2 ; v1(934,169) 1136.52,169 1161.62,194.1 1161.62,230.68 U6.55
  Bottom Layer w10: v1(618,735) 890,463 890,213 v1(934,169)
LIN-TXD: LIN.4 U6.42 | length 739.8
  Top Layer w10: LIN.4 735.63,920 1080,575.63 1080,463 1037,420 U6.42
MOTOR-DRIVE1: U2.3 U6.37 | length 315.6
  Top Layer w10: U2.3 695.24,603 760,603 844.57,518.43 U6.37
MOTOR-DRIVE2: U2.2 U6.38 | length 303.1
  Top Layer w10: U2.2 782.54,555 838.8,498.74 U6.38
MOTOR-OUT1: P4.4 U2.6 | length 380
  Top Layer w30: v5(418,609) 420,607 470.76,607 U2.6
  Top Layer w50: P4.4@239,853.55 P4.4
  Bottom Layer w50: P4.4 239,853.55 309,783.55 309,718 v5(418,609)
MOTOR-OUT2: P4.5 U2.8 | length 457.6
  Top Layer w30: U2.8@464.76,497 U2.8@469,501.24 ; v5(469,487) U2.8@469,501.24 ; U2.8@469,502.8 U2.8@469,501.24 ; U2.8 U2.8@469,501.24
  Bottom Layer w50: P4.5 239,604 356,487 v5(469,487)
NetC1_1: C1.1 CAN.5 | length 220.1
  Top Layer w10: CAN.5 676.85,221 749.88,294.03 C1.1
NetC17_2: C17.2 R17.1 S1.1 U6.7 | length 934.9
  Top Layer w10: U6.7 1481.2,420 1654.5,593.3 1727.3,593.3 1908.28,774.28 1908.28,805.13 1917.06,813.91 R17.1
  Top Layer w20: R17.1 C17.2 1994.75,819.63 1996.72,819.63 2003.09,826 2027,826 2075,874 S1.1
NetD1_1: D1.1 J1.1 | length 529.3
  Top Layer w20: D1.1 1629.28,916.11 1629.28,977.27 1682.22,1030.21 1682.22,1129.79 J1.1
NetD6_2: D6.2 U6.1 | length 596
  Top Layer w10: U6.1 1433.69,301.89 1434.53,301.05 1434.53,277.47 v1(1473,239) ; v1(1858,239) 1958.83,239 D6.2
  Bottom Layer w10: v1(1473,239) v1(1858,239)
NetJ1_2: J1.2 R4.1 | length 320.6
  Top Layer w10: R4.1 1809,909.94 1854.65,955.58 J1.2 ; R4.1@1812,900.06 R4.1@1812,904
NetJ1_3: J1.3 R2.1 R3.1 | length 541.6
  Top Layer w10: R3.1@1809,747.06 R3.1 1808.83,751.17 1809.03,751.37 R2.1@1809.03,828.97 ; R2.1@1809.06,832.94 R2.1 v1(1859,829)
  Bottom Layer w10: v1(1859,829) 1859,1129.4 J1.3
NetLED1_1: LED1.1 R10.2 | length 134.6
  Top Layer w20: R10.2 1501.47,1377.53 LED1.1
NetLED2_1: LED2.1 R11.2 | length 130.7
  Top Layer w20: R11.2 1504.94,1522.06 LED2.1
NetLED3_1: LED3.1 R13.2 | length 238.2
  Top Layer w10: R13.2@126.06,308 130,308 v1(130,277) ; R13.2@130,316 R13.2@133.94,316 ; LED3.1@270,347 LED3.1@270,349
  Bottom Layer w10: v1(130,277) 245,277 270,302 LED3.1@270,349
NetLED4_1: LED4.1 R15.2 | length 337.1
  Top Layer w10: R15.2 196.94,367.53 205.72,358.75 205.72,354.81 254.53,306 439,306 LED4.1 ; R15.2@193,375.53 R15.2@196.94,375.53
NetR5_1: R5.1 U2.7 | length 156.6
  Top Layer w30: R5.1@356,532 378,554 377,555 ; R5.1@357,575 377,555 ; U2.7 377,555
NetR6_2: R6.2 R7.2 U2.4 | length 145.1
  Top Layer w10: U2.4 760.01,655 769.06,645.94 R7.2 773.74,645.21 833.26,645.21 R6.2
NetR16_1: R16.1 U6.60 | length 380.3
  Top Layer w10: U6.60 1260.74,231.37 1260.74,287.74 1285,312 1341,312 1386,267 R16.1
OLED-SCL: P6.3 U6.58 | length 642.2
  Top Layer w10: v1(1217.93,182.98) 1217.93,185.68 1220.68,188.43 1220.68,230.68 U6.58
  Bottom Layer w10: v1(1217.93,182.98) 1218,182.9 1218,162.86 1223.86,157 1669.67,157 1717,109.67 P6.3
OLED-SDA: P6.4 U6.59 | length 674.9
  Top Layer w10: U6.59 1241.06,230.68 1241.06,187.42 1245.77,182.71 v1(1245.77,180)
  Bottom Layer w10: v1(1245.77,180) 1695,180 P6.4
PA0: U6.14
PA2: U6.16
PA3: U6.17
PA4: U6.20
PA8: P4.2 U6.41 | length 992.3
  Top Layer w10: v1(863,436) 865.71,436 869.39,439.68 U6.41
  Bottom Layer w10: P4.2 241,1056 861,436 v1(863,436)
PA11: R4.2 U6.44 | length 1120.5
  Top Layer w10: U6.44 1257.07,380.63 1257.62,381.17 1264.69,381.17 v1(1266.6,383.09) ; v1(1694,635) 1694,846.12 1749.94,902.06 R4.2
  Bottom Layer w10: v1(1266.6,383.09) 1442.09,383.09 v1(1694,635)
PA12: R3.2 U6.45 | length 998.8
  Top Layer w10: U6.45 973.34,361.29 1009.21,361.29 1009.65,361.72 1027.96,361.72 1030.14,359.54 1056.05,359.54 v1(1057.96,357.63) ; v1(1721,625) 1749.47,653.47 1749.47,750.53 R3.2
  Bottom Layer w10: v1(1057.96,357.63) 1453.63,357.63 v1(1721,625)
PA13: P5.2 U6.46 | length 384.6
  Top Layer w10: U6.46 973.34,340.91 1009.92,340.91 1026.27,324.56 v4(1026.27,324.26)
  Bottom Layer w10: v4(1026.27,324.26) 1087.76,262.77 1087.76,136.24 P5.2
PA14: P5.3 U6.49 | length 189
  Top Layer w10: v4(1037,197) 1038.87,197 1043.86,201.99 U6.49
  Bottom Layer w10: v4(1037,197) 1037,95.8 1066,66.8 P5.3
PA15: U6.50
PB0: U6.26
PB1: U6.27
PB2: R12.1 U6.28 | length 85.2
  Top Layer w10: R12.1 1122.27,752.67 1122.27,668.36 U6.28
PB4: U6.56
PB5: U6.57
PB12: U6.33
PB13: U6.34
PB14: U6.35
PB15: U6.36
PC5: U6.25
PC10: U6.51
PC11: U6.52
PC12: U6.53
PC13: U6.2
PC14: C18.2 U6.3 Y2.1 | length 324.5
  Top Layer w10: U6.3 1467.77,341.26 1499.52,309.52 1499.52,273.28 1551,221.8 Y2.1 C18.2
PC15: C19.2 U6.4 Y2.2 | length 249.7
  Top Layer w10: U6.4 1473.54,360.94 1539.19,295.3 Y2.2 1554.7,299 C19.2
PD0: C15.1 R14.2 U6.5 Y1.1 | length 432.2
  Top Layer w10: U6.5@1410.08,380.55 U6.5 1479.31,380.63 1495.47,364.47 R14.2 ; R14.2@1534.92,364.55 R14.2 ; R14.2@1542.81,372.28 R14.2 ; Y1.1@1612.96,378 1615,380.04 Y1.1@1618.94,380.04 ; C15.1 1784.44,370.03 1751.8,337.39 1661.59,337.39 1626.94,372.04 1619.37,364.47 R14.2
PD1: C16.1 R14.1 U6.6 Y1.3 | length 422.2
  Top Layer w10: U6.6 1507.85,400.31 1531.06,423.53 1538.94,423.53 1547.72,432.31 1547.72,436.24 1585.47,474 1664.74,474 1701.74,437 Y1.3 C16.1
PD2: U6.54
VCC: C3.1 C4.2 C6.1 C7.2 LIN.3 LIN.7 P3.2 U2.5 U5.3 | length 2218.9
  Top Layer w20: 367,787 399.12,819.12 ; 367,820 367.88,819.12 397.88,819.12 ; 367,850 397.88,819.12 ; LIN.3 653,870 603,820 LIN.7 505.28,819.56 435.44,819.56 C4.2 399.12,819.12 ; 397.88,819.12 399.12,819.12
  Top Layer w50: P3.2 385.3,1372 407.3,1394 C6.1 ; U2.5 463.87,655 367,751.87 367,787 367,820 367,850 367,934.25 435.25,1002.5 435.25,1102.5 441.75,1109 C3.1 445.05,1109.35 445.05,1393.65 C6.1 ; U5.3 577.4,1489.3 C6.1@482.1,1394 ; C7.2 600.1,1276 C6.1@482.1,1394 ; C6.1 C6.1@482.1,1394
  Bottom Layer w50: P3.2 P3.2@241.73,1370.27
pads on no net: J1.Shell LIN.8 Y1.2 Y1.4

## Polygon pours and split planes (outlines as drawn)
GND on Bottom Layer "GND_L02_P001" (solid, remove dead copper, pour order 1): -5,1576 2362,1576 2364,1574 2364,-2 -2,-2
GND on Top Layer "GND_L01_P000" (solid, remove dead copper, pour order 0): 2,1569 4,1567 2361,1567 2361,9 2356,4 -2,4

## Silkscreen, mask and mechanical layers (free items; w line width, h text height)
Top Overlay:
  drawing of 25 lines, arcs and shapes, not listed
Bottom Overlay:
  drawing of 8 lines, arcs and shapes, not listed
  text "Confirm" at 2148,731 h30
  text "Right" at 2146,632 h30
  text "Left" at 2146,528 h30
  text "Down" at 2147,427 h30
  text "HW:2.1" at 1383,406 h60
  text "Up" at 2142,322 h30
  text "20220609" at 1393,312 h60
  text "3.3" at 1255,115 h30 r270
  text "SWD" at 1151,114 h30 r270
  text "GND" at 953,113 h30 r270
  text "3.3" at 1502,111 h30 r270
  text "SWC" at 1052,109 h30 r270
  text "GND" at 1603,109 h30 r270
  text "SCL" at 1705,109 h30 r270
  text "SDA" at 1812,107 h30 r270
  text "SWD" at 895,27 h30
  text "OLED" at 1996,23 h30
Mechanical 1:
  lines w10: 0,0 0,1570 2362.2,1570 2362.2,0 0,0

## Text inside footprints (layer, text, board x,y; h text height)
P7: Bottom Overlay "2" at 2336,269 h30 r270; Bottom Overlay "1" at 2166,274 h30 r270; Bottom Overlay "9" at 2226,769 h30 r270; Bottom Overlay "10" at 2326,739 h30 r270